# EAGLE board Rudder - Prototype 1 (EAGLE 7.2.0)
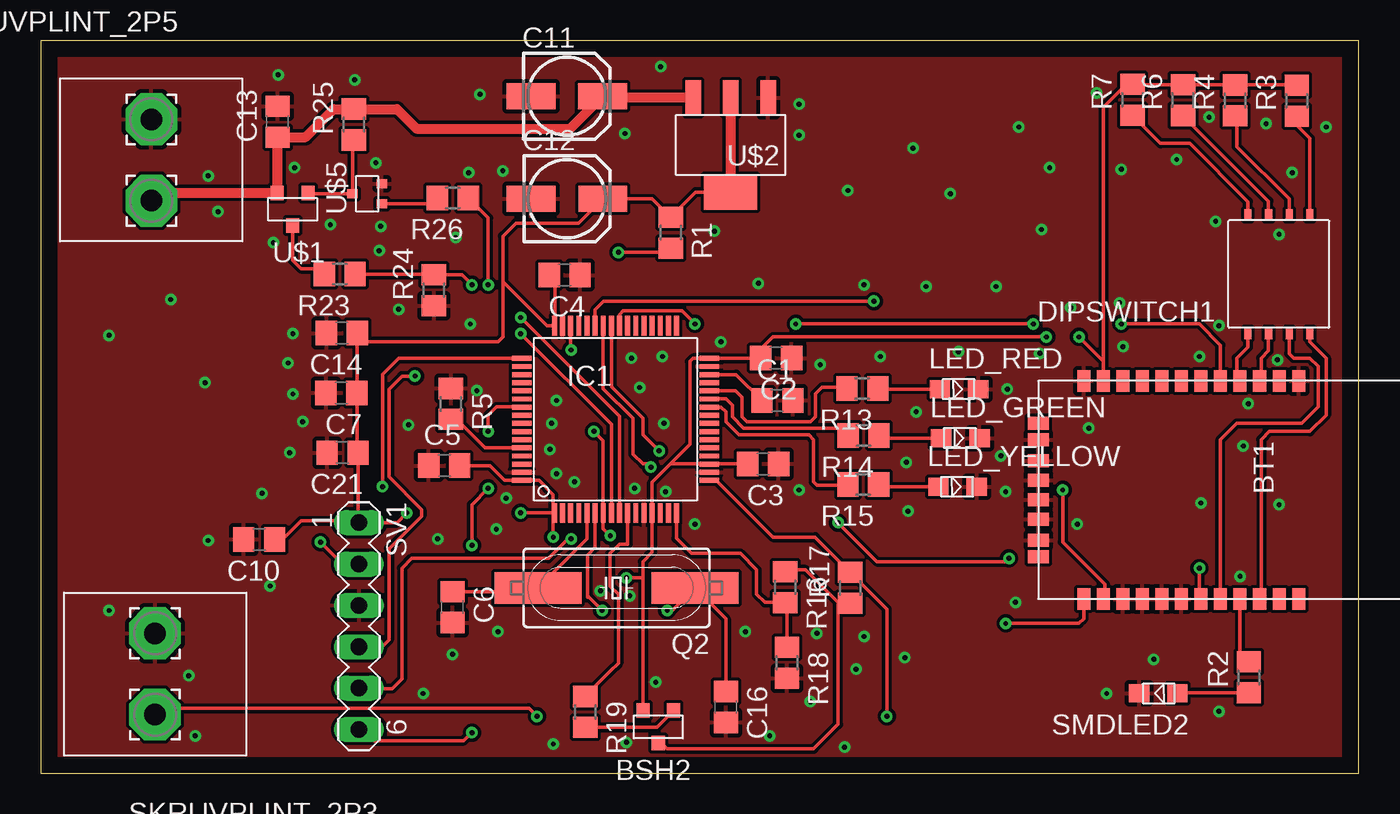
[diagram p0: board, top side]
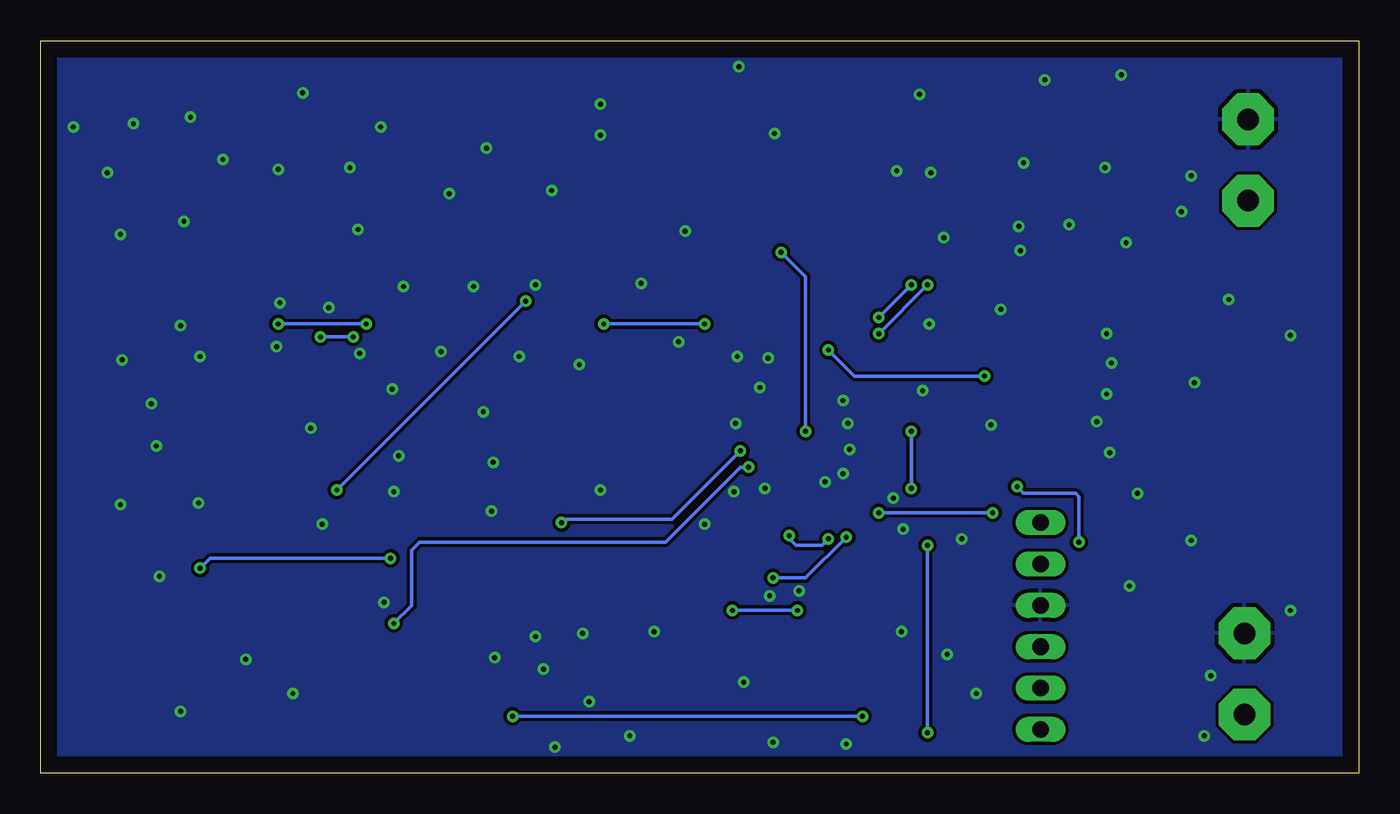
[diagram p1: board, bottom side, seen from below]

Size 81 x 45 mm. Coordinates in mm from the lower left corner, seen from the top.
Outline: 0,0 81,0 81,45 0,45 0,0
Copper layers (1*16): Top 0.035mm / dielectric 1.5mm / Bottom 0.035mm
Design rules "default *": minimum track width 0.2mm, minimum drill 0.3mm, track to track 0.2mm, track to pad 0.2mm, pad to pad 0.2mm, via to via 0.2mm, smd to smd 0mil, copper to edge 40mil, drill to drill 8mil, minimum pad ring 10mil, minimum via ring 8mil, stop-mask expansion 4mil, vias tented up to drill 0mil, thermal gap 10mil

## Footprints (pad centres in the part's own frame; a part is rotated, then mirrored left to right if it is on the bottom)
P-CHANNEL = smd 0.8 x 0.9: DRAIN 0,1; GATE -0.95,-1; SOURCE 0.95,-1
RN42 = smd 1.3 x 0.8: 1 -6.7,3.2; 2 -6.7,2; 3 -6.7,0.8; 4 -6.7,-0.4; 5 -6.7,-1.6; 6 -6.7,-2.8; 7 -6.7,-4; 8 -6.7,-5.2; 9 -6.7,-6.4; 10 -6.7,-7.6; 11 -6.7,-8.8; 12 -6.7,-10; 13 6.7,-10; 14 6.7,-8.8; 15 6.7,-7.6; 16 6.7,-6.4; 17 6.7,-5.2; 18 6.7,-4; 19 6.7,-2.8; 20 6.7,-1.6; 21 6.7,-0.4; 22 6.7,0.8; 23 6.7,2; 24 6.7,3.2 | smd 0.8 x 1.3: 28 3.1,-12.8; 29 -3.1,-12.8; 30 4.1,-12.8; 31 1.8,-12.8; 32 0.6,-12.8; 33 -0.6,-12.8; 34 -1.8,-12.8; 35 -4.1,-12.8
C0805 = smd 1.3 x 1.5: 1 -0.95,0; 2 0.95,0
153CLV-0505 = smd 3 x 1.6: + 2.2,0; - -2.2,0
DIPSWITCH4P = smd 0.44 x 0.7: B1 0,0; B2 1.27,0; B3 2.54,0; B4 3.81,0; T1 0,7.3; T2 1.27,7.3; T3 2.54,7.3; T4 3.81,7.3
LQFP64 = smd 0.3 x 1.2: 1 -3.75,-5.75; 2 -3.25,-5.75; 3 -2.75,-5.75; 4 -2.25,-5.75; 5 -1.75,-5.75; 6 -1.25,-5.75; 7 -0.75,-5.75; 8 -0.25,-5.75; 9 0.25,-5.75; 10 0.75,-5.75; 11 1.25,-5.75; 12 1.75,-5.75; 13 2.25,-5.75; 14 2.75,-5.75; 15 3.25,-5.75; 16 3.75,-5.75; 33 3.75,5.75; 34 3.25,5.75; 35 2.75,5.75; 36 2.25,5.75; 37 1.75,5.75; 38 1.25,5.75; 39 0.75,5.75; 40 0.25,5.75; 41 -0.25,5.75; 42 -0.75,5.75; 43 -1.25,5.75; 44 -1.75,5.75; 45 -2.25,5.75; 46 -2.75,5.75; 47 -3.25,5.75; 48 -3.75,5.75 | smd 1.2 x 0.3: 17 5.75,-3.75; 18 5.75,-3.25; 19 5.75,-2.75; 20 5.75,-2.25; 21 5.75,-1.75; 22 5.75,-1.25; 23 5.75,-0.75; 24 5.75,-0.25; 25 5.75,0.25; 26 5.75,0.75; 27 5.75,1.25; 28 5.75,1.75; 29 5.75,2.25; 30 5.75,2.75; 31 5.75,3.25; 32 5.75,3.75; 49 -5.75,3.75; 50 -5.75,3.25; 51 -5.75,2.75; 52 -5.75,2.25; 53 -5.75,1.75; 54 -5.75,1.25; 55 -5.75,0.75; 56 -5.75,0.25; 57 -5.75,-0.25; 58 -5.75,-0.75; 59 -5.75,-1.25; 60 -5.75,-1.75; 61 -5.75,-2.25; 62 -5.75,-2.75; 63 -5.75,-3.25; 64 -5.75,-3.75
SMD_LED_CUSTOM = smd 1.25 x 1.1: 1 0,0; 2 2.35,0
HC49UP = smd 5.334 x 1.93: 1 -4.826,0; 2 4.826,0
R0805 = smd 1.3 x 1.5: 1 -0.95,0; 2 0.95,0
SKRUVPLINT_2P = drill 1.321 pad 3.175 octagon: 3 0,5; 4 0,0
MA06-1 = drill 1.016 long: 1 -6.35,0; 2 -3.81,0; 3 -1.27,0; 4 1.27,0; 5 3.81,0; 6 6.35,0
SOT-223 = smd 0.95 x 2.15: GND -2.3,-2.9; INPUT 2.3,-2.9; OUTPUT 0,-2.9 | smd 3.25 x 2.15: VOUT 0,2.9
SOT-323 = smd 0.559 x 0.648: DRAIN 0,0.895; GATE -0.623,-0.895; SOURCE 0.623,-0.895

## Placement (x,y rotation side)
BSH2  ZXMP10A13F  [P-CHANNEL]  37.95,2.85 180 top
BT1  BLUETOOTH-RN42  [RN42]  74.1,17.4 270 top
C1  4u7  [C0805]  45.27,22.91 0 top
C2  100n  [C0805]  45.2,25.5 180 top
C3  100n  [C0805]  44.4,19 180 top
C4  100n  [C0805]  32.2,30.6 180 top
C5  100n  [C0805]  24.8,18.9 0 top
C6  25p  [C0805]  25.31,10.21 270 top
C7  100n  [C0805]  18.48,23.36 180 top
C10  100n  [C0805]  13.43,14.36 180 top
C11  10u  [153CLV-0505]  32.33,41.59 0 top
C12  10u  [153CLV-0505]  32.34,35.29 0 top
C13  100n  [C0805]  14.56,40.02 90 top
C14  100n  [C0805]  18.51,27.04 180 top
C16  25p  [C0805]  42.11,4.07 270 top
C21  1u  [C0805]  18.55,19.69 180 top
DIPSWITCH1  DIPSWITCH_4P  [DIPSWITCH4P]  77.99,34.31 180 top
IC1  STM32F401RBT  [LQFP64]  35.32,21.74 0 top
LED_GREEN  SMD_LED  [SMD_LED_CUSTOM]  55.34,20.59 0 top
LED_RED  SMD_LED  [SMD_LED_CUSTOM]  55.26,23.59 0 top
LED_YELLOW  SMD_LED  [SMD_LED_CUSTOM]  55.17,17.59 0 top
Q2  18p  [HC49UP]  35.38,11.39 180 top
R1  10k  [R0805]  38.71,33.21 270 top
R2  220  [R0805]  74.24,5.89 90 top
R3  1k  [R0805]  77.19,41.31 90 top
R4  1k  [R0805]  73.39,41.33 90 top
R5  10k  [R0805]  25.21,22.69 270 top
R6  1k  [R0805]  70.19,41.35 90 top
R7  1k  [R0805]  67.09,41.37 90 top
R13  220  [R0805]  50.49,23.64 180 top
R14  220  [R0805]  50.57,20.74 180 top
R15  220  [R0805]  50.55,17.74 180 top
R16  350  [R0805]  45.76,11.43 270 top
R17  350  [R0805]  49.74,11.39 90 top
R18  350  [R0805]  45.86,6.79 270 top
R19  1k  [R0805]  33.46,3.77 270 top
R23  6.8k  [R0805]  18.38,30.66 180 top
R24  3.3k  [R0805]  24.16,29.67 90 top
R25  10k  [R0805]  19.24,39.85 90 top
R26  1k  [R0805]  25.33,35.34 180 top
SKRUVPLINT_2P3  SKRUVPLINT_2P  [SKRUVPLINT_2P]  7.03,3.6 0 top
SKRUVPLINT_2P5  SKRUVPLINT_2P  [SKRUVPLINT_2P]  6.8,40.17 180 top
SMDLED2  SMD_LED  [SMD_LED_CUSTOM]  69.85,4.91 180 top
SV1  [MA06-1]  19.56,9.04 270 top
U$1  ZXMP10A13F  [P-CHANNEL]  15.48,34.65 180 top
U$2  LM1117  [SOT-223]  42.4,38.6 180 top
U$5  SI1330EDL  [SOT-323]  20.06,35.6 90 top

## Library data of the parts
BSH2 U$1 = ZXMP10A13F
BT1 = RN42
C1-C7 C10-C14 C16 C21 R1 R5 R16-R19 R23-R26 = rcl
DIPSWITCH1 = dipswitch4p
IC1 = E7020E
LED_GREEN LED_RED LED_YELLOW SMDLED2 = greenled_smd
Q2 = crystal; OC_FARNELL: unknown; OC_NEWARK: unknown
R2-R4 R6 R7 R13-R15 = resistor
SKRUVPLINT_2P3 SKRUVPLINT_2P5 = skruvplint2p_CTB0700
SV1 = E7020E; OC_FARNELL: unknown; OC_NEWARK: unknown
U$2 = LM1117
U$5 = SI1330EDL

## Nets
+3V3: BSH2.SOURCE BT1.11 C2.2 C3.2 C4.2 C5.2 C7.1 C10.1 C12.+ C14.1 C21.1 IC1.1 IC1.13 IC1.19 IC1.32 IC1.48 IC1.64 R1.1 R3.2 R4.2 R6.2 R7.2 SV1.1 U$2.OUTPUT U$2.VOUT
BAT_MEAS: IC1.8 R23.1 R24.2
BATMEAS_ON/OFF: IC1.9 R26.1
BT1_CONNSTAT: BT1.19 IC1.41
BT1_GPIO3: BT1.20 DIPSWITCH1.T2
BT1_GPIO4: BT1.22 DIPSWITCH1.T1
BT1_GPIO6: BT1.3 DIPSWITCH1.T3
BT1_GPIO7: BT1.4 DIPSWITCH1.T4
BT1_RESET: BT1.5 IC1.40
BT1_USART1_RX: BT1.14 IC1.43
BT1_USART1_TX: BT1.13 IC1.42
GND: BT1.1 BT1.12 BT1.15 BT1.16 BT1.17 BT1.18 BT1.28 BT1.29 BT1.31 BT1.32 BT1.33 BT1.34 C1.2 C2.1 C3.1 C4.1 C5.1 C6.2 C7.2 C10.2 C11.- C12.- C13.2 C14.2 C16.2 C21.2 IC1.12 IC1.18 IC1.31 IC1.47 IC1.63 LED_GREEN.2 LED_RED.2 LED_YELLOW.2 R5.1 R18.2 R24.1 SKRUVPLINT_2P3.3 SKRUVPLINT_2P5.4 SMDLED2.2 SV1.3 U$2.GND U$5.SOURCE
LED_GREEN: IC1.27 R14.2
LED_RED: IC1.28 R13.2
LED_YELLOW: IC1.26 R15.2
N$1: C1.1 IC1.30
N$2: IC1.60 R5.2
N$3: LED_RED.1 R13.1
N$4: BT1.21 R2.2
N$5: DIPSWITCH1.B1 R3.1
N$6: DIPSWITCH1.B2 R4.1
N$7: DIPSWITCH1.B3 R6.1
N$8: C6.1 IC1.5 Q2.2
N$9: C16.1 IC1.6 Q2.1
N$10: DIPSWITCH1.B4 R7.1
N$11: R2.1 SMDLED2.1
N$16: LED_GREEN.1 R14.1
N$17: LED_YELLOW.1 R15.1
N$18: BSH2.DRAIN R16.1 R17.1
N$19: BSH2.GATE R19.2
N$22: C11.+ C13.1 R25.2 SKRUVPLINT_2P5.3 U$1.SOURCE U$2.INPUT
N$25: R23.2 U$1.DRAIN
N$26: R25.1 U$1.GATE U$5.DRAIN
N$27: R26.2 U$5.GATE
NRST: IC1.7 R1.2 SV1.5
STRAIN_ADC1: IC1.16 R16.2 R18.1
STRAIN_ADC2: IC1.17 R17.2 SKRUVPLINT_2P3.4
STRAIN_ON/OFF: IC1.10 R19.1
SWCLK: IC1.49 SV1.2
SWDIO: IC1.46 SV1.4
SWO: IC1.55 SV1.6

## Tracks (layer width: path | path; a pad name or v marks a point on that pad's centre or on a via)
+3V3  (via drill 0.3)
  Top 0.2: C14.1 19.46,26.5 | 19.46,26.5 19.46,23.39 | C7.1 19.43,19.76 | 37,12 37,13 37.57,13.57 IC1.13 37.57,17.87 38.7,19 | 37,12 BSH2.SOURCE | 77.17,42.28 R4.2 73.37,42.3 R6.2 67.11,42.3 | 14.38,14.38 C10.1 14.86,14.36 16,15.5 19.45,15.5 SV1.1 | C21.1 19.5,15.45 SV1.1 | v29.5,16 v29.51,15.99 IC1.1 | 37,12 v36,12 | v31.5,14.5 31.5,15.92 IC1.1 | SV1.1 21.89,15.39 v22.5,16 | 28.4,30.2 28.4,33 29.2,33.8 33.05,33.8 C12.+ 37.58,35.29 R1.1 40.25,35.7 U$2.VOUT | 28.4,30.2 28.4,26.8 28.1,26.5 19.46,26.5 | C4.2 31.25,30.55 31.6,30.2 31.6,27.52 IC1.48 31.11,27.49 28.4,30.2 | C5.2 27.6,18.9 28.51,17.99 IC1.64 30.61,17.99 31.5,17.1 31.5,16.06 IC1.1 | C3.2 IC1.19 | IC1.19 | IC1.19 38.7,19 | 38.7,19 39.9,20.2 39.9,25.3 40.09,25.49 IC1.32 C2.2 44.5,25.75 44.5,26.1 44.3,26.1 45,26.8 v61.8,26.8 | 67.11,42.3 R7.2 | 67.11,42.3 66.91,42.1 66.5,42.1 65.3,40.9 65.3,25.3 | 65.3,25.3 BT1.11 | v63.8,26.8 65.3,25.3
  Top 0.4: 38.68,34.19 R1.1 38.53,34.34 | 19.46,23.39 C7.1 | 19.43,19.76 C21.1 | 77.17,42.28 R3.2
  Top 0.6: U$2.OUTPUT U$2.VOUT
  Bottom 0.2: v22.5,16 v29.5,16 | v36,12 34,12 v31.5,14.5 | v61.8,26.8 v63.8,26.8
BAT_MEAS  (via drill 0.3)
  Top 0.2: R23.1 24.12,30.66 | R24.2 25.88,30.62 v26.5,30 | v29.5,27 35.07,21.43 IC1.8
  Top 0.4: 24.12,30.66 R24.2 24.16,30.84 24,31
  Bottom 0.2: v26.5,30 v29.5,27
BATMEAS_ON/OFF  (via drill 0.3)
  Top 0.2: IC1.9 35.57,21.93 v29.5,28 | v27.5,30 27.5,34.12 R26.1
  Bottom 0.2: v29.5,28 v27.5,30
BT1_CONNSTAT  (via drill 0.3)
  Top 0.2: IC1.41 35.07,23.73 37,21.8 37,20.8 v38,19.8 | v49,15.4 51.4,13 59.3,13 v59.5,13.2 | v71.2,12.6 71.2,10.8 BT1.19
  Bottom 0.2: v38,19.8 42.2,15.6 48.8,15.6 v49,15.4 | v59.5,13.2 70.6,13.2 v71.2,12.6
BT1_GPIO3
  Top 0.2: BT1.20 72.5,20.5 73.5,21.5 77.5,21.5 78.5,22.5 78.5,25 78,25.5 77,25.5 76.72,25.78 DIPSWITCH1.T2
BT1_GPIO4
  Top 0.2: BT1.22 75,10.8 75,20.5 75.5,21 78,21 79,22 79,25.5 77.99,26.51 DIPSWITCH1.T1
BT1_GPIO6
  Top 0.2: DIPSWITCH1.T3 75.45,25.95 75,25.5 75,24.2 BT1.3
BT1_GPIO7
  Top 0.2: DIPSWITCH1.T4 74.18,26.18 73.5,25.5 73.5,24.3 BT1.4
BT1_RESET  (via drill 0.3)
  Top 0.2: BT1.5 72.5,26.3 71.2,27.6 v66.4,27.6 | v61,27.6 v46.4,27.6 | v40.2,27.6 39.4,28.4 35.8,28.4 35.57,28.17 IC1.40
  Bottom 0.2: v66.4,27.6 v61,27.6 | v46.4,27.6 v40.2,27.6
BT1_USART1_RX  (via drill 0.3)
  Top 0.2: IC1.43 34.07,28.47 34.6,29 v51.2,29 | BT1.14 65.4,10.8 65.4,11.6 62.8,14.2 v62.8,17.4
  Bottom 0.2: v51.2,29 v62.8,17.4
BT1_USART1_TX  (via drill 0.3)
  Top 0.2: IC1.42 34.57,23.63 36.4,21.8 36.4,19.6 37,19 37.3,19 v37.5,18.8 | v59.3,9.2 63.8,9.2 64.1,9.5 BT1.13
  Bottom 0.2: v37.5,18.8 38,18.8 42.6,14.2 57.7,14.2 58.2,13.7 58.2,10.3 v59.3,9.2
GND  (via drill 0.3)
  other vias: 4.2,26.9 10.1,24 8,29.1 59.3,17.3 47.3,4.4 15.3,19.7 15.5,23.3 15.5,27 31.7,22.9 31.4,21.5 31.3,19.9 36.3,25.5 38.2,25.6 36.8,23.7 22.6,21.4 25.3,7.3 10.3,14.3 31.5,1.8 44.8,2.3 43.3,8.7 50.6,8.4 59,19.5 59.4,23.6 65.5,4.9 59.9,10.5 34.4,11.2 36.2,10.9 71.8,40.3 75.3,39.9 66.4,37.1 46.6,39.2 46.6,41.1 35.9,39.3 17.8,33.7 20.8,32.1 20.9,33.6 15.6,37.2 20.6,37.5 44.1,30.1 50.6,30 51.6,25.6 54.4,29.9 56.4,25.9 58.7,29.9 61.4,25.8 63.3,28.6 66.5,26.2 72.4,27.5 66.3,28.9 76,25.4 71.2,25.6 74.2,22.7 73.9,20.1 73.7,12.1 72.4,3.8 71.3,16.6 76.1,16.5 9.1,6 37.8,5.6 36,1.9 46.6,17.4 36.5,17.5 40.2,15.3 10.9,34.5 10.3,36.7 9.5,2.3 23.5,4.9 14.1,11.5 13.6,17.2 28.1,8.7 16.1,21.6 15.2,25.2 26.4,27.6 22,28.5 14.3,32.6 25.5,32.9 26.3,36.9 19.3,42.6 14.6,42.9 28.4,37 27,41.7 38.1,43.4 69.8,37.7 64.9,41.8 60.1,39.7 79,39.7 38.3,21.5 32.8,17.9 31.7,18.4 53.3,16.1 53.2,19.1 53.8,22.2 68.4,7 24.4,14.4 28,15 28.6,16.9 41.8,26.5 47.9,25.1 50.1,6.4 47.7,8.6 41.4,33.3 49.6,35.8 55.9,35.6 53.6,38.4 61.5,33.4 62,37.2 72.2,33.9 76.1,33.1 76.9,36.9 64.4,21.2 63.7,15.3 53.1,7.1 4.2,10 26.8,23.5 49.4,1.6 38.4,17.3
  pour Top: 0,45 81,45 81,44.9 81,0 0,0
  pour Bottom: 0,45 81,45 81,0 0,0
LED_GREEN
  Top 0.2: R14.2 arc90 49.16,21.2 43.2,21.2 42.5,21.9 42.5,22.6 42.1,23 IC1.27
LED_RED
  Top 0.2: R13.2 49.48,23.7 48,23.7 47.6,23.3 47.6,21.9 47.3,21.6 43.4,21.6 43.1,21.9 43.1,23.1 42.7,23.5 IC1.28
LED_YELLOW
  Top 0.2: IC1.26 41.81,22.49 42.1,22.2 42.1,21.6 42.9,20.8 47.2,20.8 47.5,20.5 47.5,17.9 47.7,17.7 49.56,17.7 R15.2
N$1
  Top 0.2: C1.1 42.74,24.49 IC1.30
N$2
  Top 0.2: IC1.60 27.3,20 25.56,21.74 R5.2
N$3
  Top 0.2: LED_RED.1 51.49,23.59
  Top 0.4: 51.49,23.59 R13.1
N$4
  Top 0.2: BT1.21 73.7,7.38 R2.2
N$5
  Top 0.2: R3.1 77.19,39.81 78,39 DIPSWITCH1.B1
N$6
  Top 0.2: DIPSWITCH1.B2 76.72,35.28 73.5,38.5 73.5,40.27 R4.1
N$7
  Top 0.2: DIPSWITCH1.B3 75.45,35.14 R6.1
N$8
  Top 0.2: C6.1 30.32,11.16 | IC1.5 33.57,14.41 Q2.2
  Top 0.4: 30.32,11.16 Q2.2
N$9  (via drill 0.3)
  Top 0.2: C16.1 42.11,9.49 Q2.1 38.82,10 v38.5,10 | IC1.6 34.07,13.87 33.6,13.4 33.6,10.8 33.7,10.8 v34.5,10
  Bottom 0.2: v34.5,10 v38.5,10
N$10
  Top 0.2: DIPSWITCH1.B4 74.18,35.12 70.6,38.7 68.81,38.7 R7.1
N$11
  Top 0.2: R2.1 69.88,4.94
  Top 0.4: 69.88,4.94 SMDLED2.1
N$16
  Top 0.2: LED_GREEN.1 51.67,20.59
  Top 0.4: 51.67,20.59 R14.1
N$17
  Top 0.2: 51.65,17.59 LED_YELLOW.1
  Top 0.4: 51.65,17.59 R15.1
N$18
  Top 0.2: R17.1 49.06,10.44 | 49.06,10.44 47,12.5 45.88,12.5 R16.1 | BSH2.DRAIN 38.15,1.85 38.5,1.5 47.5,1.5 49,3 49,10.38 49.06,10.44
N$19
  Top 0.2: R19.2 37.87,2.82 BSH2.GATE
N$22
  Top 0.4: C11.+
  Top 0.6: U$2.INPUT 34.53,41.5 C11.+ 32.54,39.6 23.1,39.6 21.9,40.8 R25.2 18,40.8 16.27,39.07 C13.1 14.56,35.68 U$1.SOURCE 7.28,35.65 SKRUVPLINT_2P5.3
N$25
  Top 0.2: U$1.DRAIN 15.48,31.52 16,31 17.09,31
  Top 0.4: 17.09,31 R23.2
N$26
  Top 0.2: 16.48,35.6 U$5.DRAIN 19.16,38.83
  Top 0.4: 16.48,35.6 U$1.GATE | 19.16,38.83 R25.1
N$27
  Top 0.2: U$5.GATE 24.02,34.98
  Top 0.4: 24.02,34.98 R26.2
NRST  (via drill 0.3)
  Top 0.2: v34,21 34.57,20.43 IC1.7 34.57,15.03 v35,14.6 | v35.5,32 38.45,32 R1.2 | v32.6,14.4 32.4,14.4 31.2,13.2 22.8,13.2 22.2,12.6 22.2,5.8 21.6,5.2 19.59,5.2 SV1.5
  Bottom 0.2: v34,21 34,30.5 v35.5,32 | v35,14.6 35,14.4 34.6,14 33,14 v32.6,14.4
STRAIN_ADC1
  Top 0.2: IC1.16 39.07,14.43 40,13.5 43,13.5 44,12.5 44,11 44.5,10.5 45.74,10.5 R16.2 | 45.86,10.38 R18.1
  Top 0.4: 45.86,10.38 R16.2
STRAIN_ADC2  (via drill 0.3)
  Top 0.2: IC1.17 41.51,17.99 45,14.5 47.58,14.5 R17.2 52,10.08 v52,3.5 | 30.4,3.6 v30.5,3.5 30,4 8,4 7.6,3.6 SKRUVPLINT_2P3.4
  Bottom 0.2: v30.5,3.5 v52,3.5
STRAIN_ON/OFF
  Top 0.2: IC1.10 36.07,14.07 35.57,14.07 35,13.5 35,11.5 35.5,11 35.5,6.76 35,6.26 34.87,6.13 R19.1
SWCLK  (via drill 0.3)
  Top 0.2: 19.85,12.85 SV1.2 18.55,12.85 v17.2,14.2 | v21,17.6 21,24.5 22,25.5 IC1.49
  Bottom 0.2: v17.2,14.2 17.2,17 17.4,17.2 20.6,17.2 v21,17.6
SWDIO  (via drill 0.3)
  Top 0.2: IC1.46 32.57,26.03 v32.6,26 | v23,24.4 22.2,24.4 21.4,23.6 21.4,18.2 23.4,16.2 23.4,15.8 21.4,13.8 21.4,8.2 21,7.8 19.59,7.8 SV1.4
  Bottom 0.2: v32.6,26 31,24.4 v23,24.4
SWO  (via drill 0.3)
  Top 0.2: SV1.6 19.81,2.69 20.5,2 26,2 v26.5,2.5 | v26.5,14 26.5,16.5 v27.5,17.5 | v27.5,21 27.5,22 28,22.5 IC1.55
  Bottom 0.2: v26.5,2.5 v26.5,14 | v27.5,17.5 v27.5,21